# Altium PCB usomiq-bone-cape.PcbDoc
Units mm, origin at the board's own origin, x right, y up, seen from the top; angles counter-clockwise.
Board outline 86.36 x 54.61 mm, 2 copper layers (Top Layer, Bottom Layer); 62 components, 135 nets, 444 pads, 5 vias.
Unrouted connection lines stored in the file: 255.
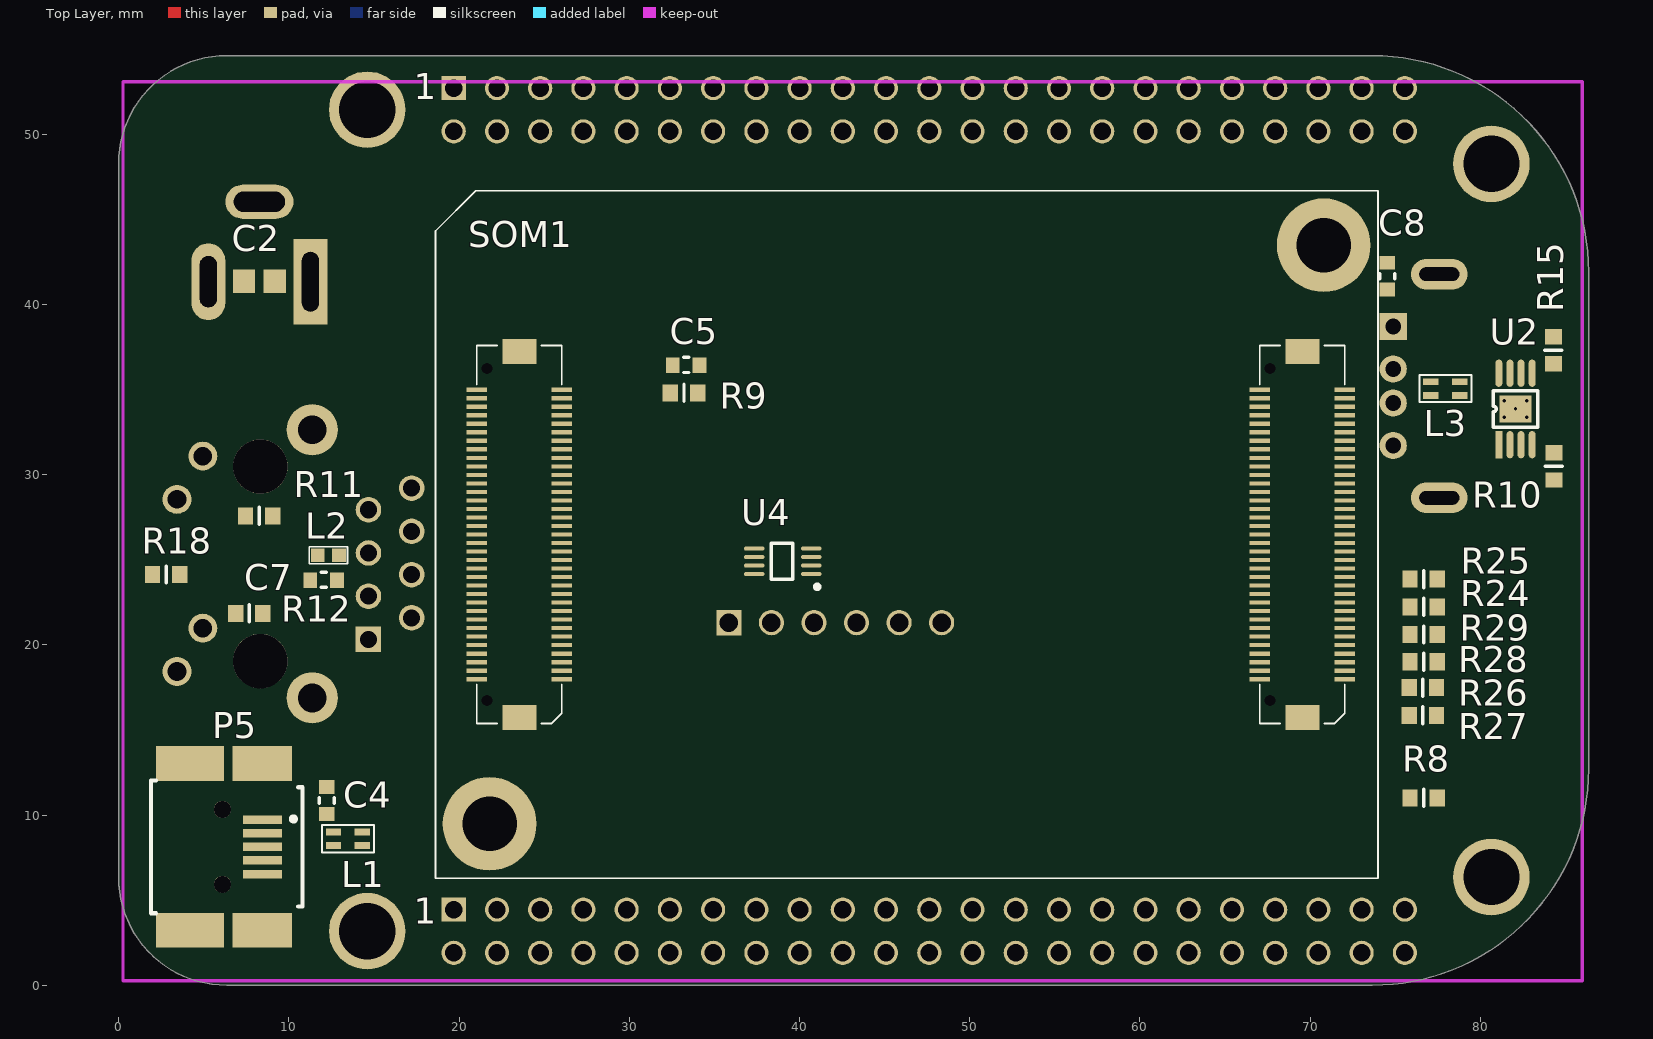
[diagram p0: Top Layer view]
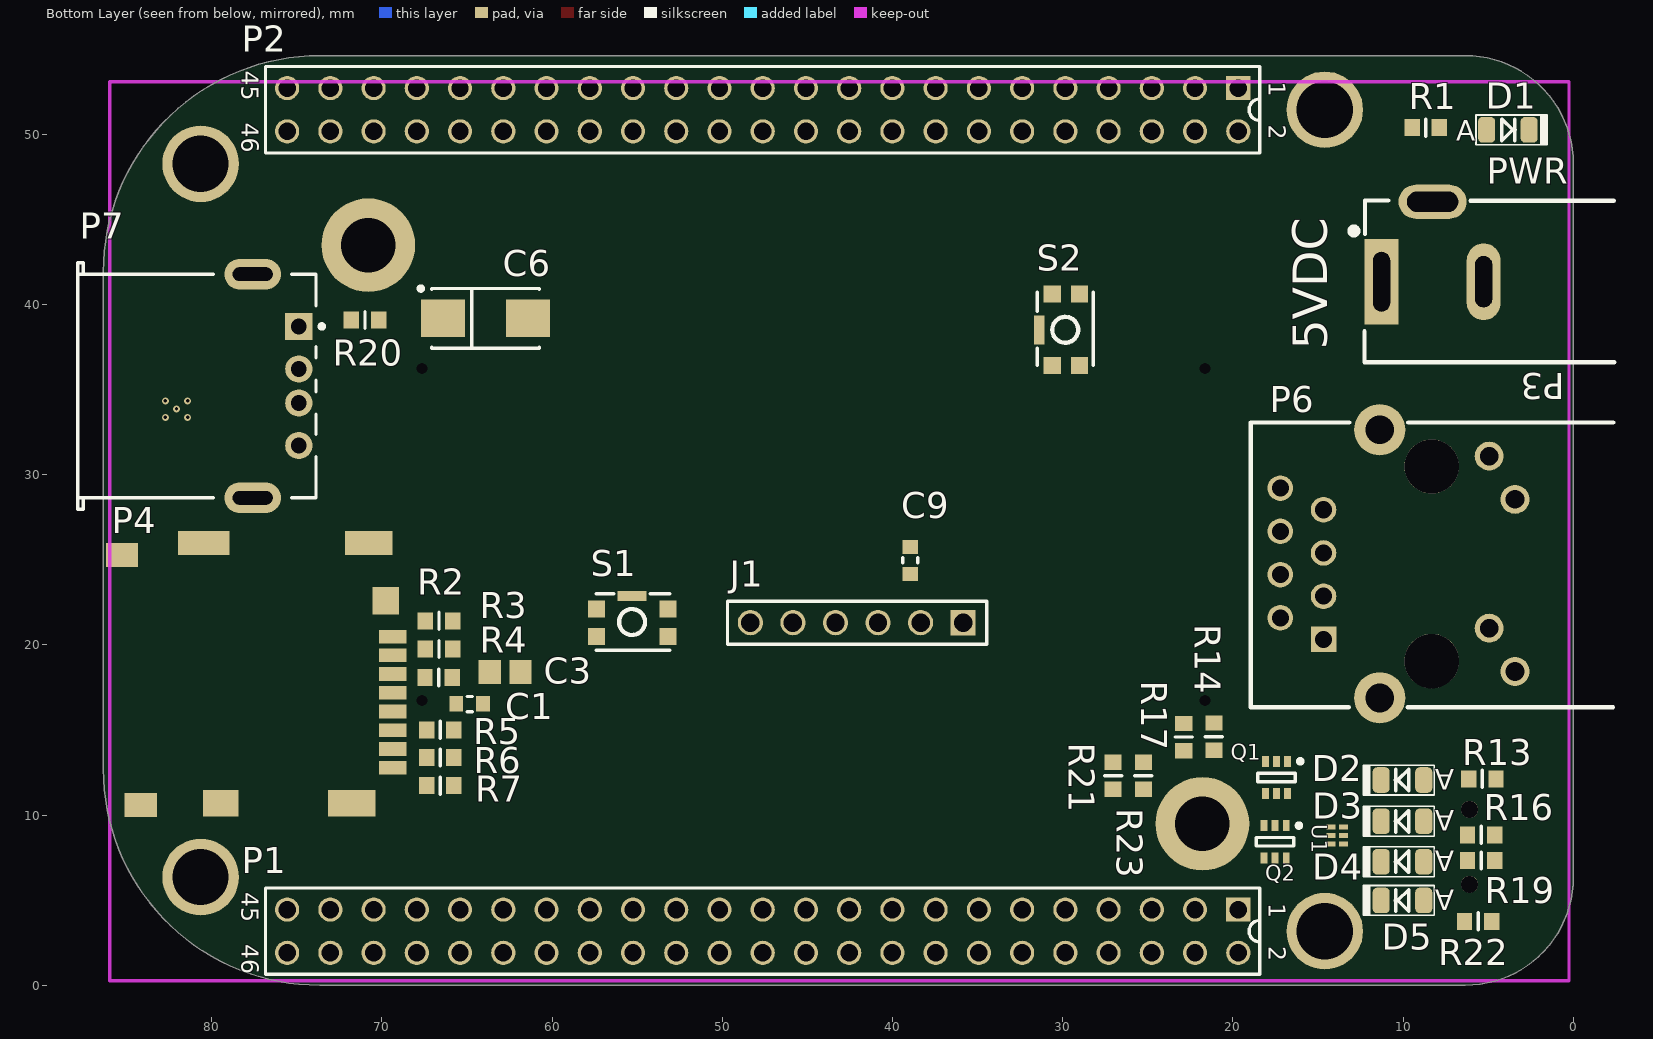
[diagram p1: Bottom Layer view, seen from below]

## Layer stack, top to bottom
Top Layer: signal copper 0.0356
Dielectric: dielectric 0.32, FR-4, Dk 4.8
Bottom Layer: signal copper 0.0356

## Board outline
0,6.35 0,48.26 cw(c6.35,48.26) 6.35,54.61 73.66,54.61 cw(c73.66,41.91) 86.36,41.91 86.36,12.7 cw(c73.66,12.7) 73.66,0 6.35,0 cw(c6.35,6.35)

## Design rules (kind name [scope] priority, off if disabled: settings)
AssemblyTestPointUsage AssemblyTestPointUsage_1 [All] p2:
AssemblyTestpoint AssemblyTestpoint_1 [All] p2: testpointundercomponent=TRUE minsize=1.016 maxsize=2.54 preferedsize=1.524 minholesize=0 maxholesize=1.016 preferedholesize=0.813 testpointgrid=0.025 usegrid=TRUE gridtolerance=0 allowsidetop=TRUE allowsidebottom=TRUE
Clearance [All] p1: gap=0.2
ComponentClearance ComponentClearance_1 [All] p2: gap=0.254 collisioncheckmode=3 verticalgap=0.254 showdistances=FALSE
DiffPairsRouting [All] p1: maxlimit=0.254 minlimit=0.254 mostfreqgap=0.254 maxuncoupledlength=12.7
DiffPairsRouting DiffPairsRouting_1 [All] p2: maxlimit=0.254 minlimit=0.254 mostfreqgap=0.254 maxuncoupledlength=12.7
FabricationTestPointUsage FabricationTestPointUsage_1 [All] p2: valid=0 allowmultiple=FALSE
FabricationTestpoint FabricationTestpoint_1 [All] p2: side=3 testpointundercomponent=TRUE minsize=1.016 maxsize=2.54 preferedsize=1.524 minholesize=0 maxholesize=1.016 preferedholesize=0.813 testpointgrid=0.025 allowsidetop=TRUE allowsidebottom=TRUE usegrid=TRUE gridtolerance=0
FanoutControl Fanout_LCC [IsLCC] p1: bgadir=Out bgaviamode=Centered fanoutstyle=Auto fanoutdirection=Alternating viagrid=0.025 // Fanout_LCC (Default Rule)
FanoutControl Fanout_BGA [IsBGA] p2: bgadir=Out bgaviamode=Centered fanoutstyle=Auto fanoutdirection=Alternating viagrid=0.025 // Fanout_BGA (Default Rule)
FanoutControl Fanout_Default [All] p4: bgadir=Out bgaviamode=Centered fanoutstyle=Auto fanoutdirection=Alternating viagrid=0.025 // Fanout_Default (Default Rule)
FanoutControl Fanout_Small [(CompPinCount < 5)] p5: bgadir=Out bgaviamode=Centered fanoutstyle=Auto fanoutdirection=OutThenIn viagrid=0.025 // Fanout_Small (Default Rule)
FanoutControl Fanout_BGA_1 [IsBGA] p6: bgadir=Out bgaviamode=Centered fanoutstyle=Auto fanoutdirection=Alternating viagrid=0.025 // Fanout_BGA (Default Rule)
FanoutControl Fanout_LCC_1 [IsLCC] p7: bgadir=Out bgaviamode=Centered fanoutstyle=Auto fanoutdirection=Alternating viagrid=0.025 // Fanout_LCC (Default Rule)
FanoutControl Fanout_SOIC_1 [IsSOIC] p8: bgadir=Out bgaviamode=Centered fanoutstyle=Auto fanoutdirection=Alternating viagrid=0.025 // Fanout_SOIC (Default Rule)
FanoutControl Fanout_Small_1 [(CompPinCount < 5)] p9: bgadir=Out bgaviamode=Centered fanoutstyle=Auto fanoutdirection=OutThenIn viagrid=0.025 // Fanout_Small (Default Rule)
FanoutControl Fanout_Default_1 [All] p10: bgadir=Out bgaviamode=Centered fanoutstyle=Auto fanoutdirection=Alternating viagrid=0.025 // Fanout_Default (Default Rule)
Height Height_1 [All] p2: minheight=0 maxheight=25.4 prefheight=12.7
HoleSize HoleSize_1 [All] p2: absolutevalues=TRUE maxlimit=2.54 minlimit=0.025 maxpercent=80.000 minpercent=20.000
HoleToHoleClearance HoleToHoleClearance_1 [All] p2: gap=0.254 allowstackedmicrovias=TRUE
LayerPairs LayerPairs_1 [All] p2: enforce=TRUE
MinimumSolderMaskSliver MinimumSolderMaskSliver_1 [All] p2: minsoldermaskwidth=0.254
NetAntennae NetAntennae_1 [All] p2: netantennaetolerance=0
PasteMaskExpansion PasteMaskExpansion_1 [All] p2: expansion=0
PlaneClearance PlaneClearance_1 [All] p2: clearance=0.508
PolygonConnect [All] p1: connectstyle=Relief reliefconductorwidth=0.254 reliefentries=4 polygonreliefangle="90 Angle" airgapwidth=0.254
PolygonConnect PolygonConnect_1 [All] p2: connectstyle=Relief reliefconductorwidth=0.254 reliefentries=4 polygonreliefangle="90 Angle" airgapwidth=0.254
RoutingPriority RoutingPriority_1 [All] p2: routingpriority=0
RoutingTopology RoutingTopology_1 [All] p2: topology=Shortest
RoutingVias [All] p1: holewidth=0.4 width=0.8 viastyle="Through Hole" minholewidth=0.711 minwidth=1.27 maxholewidth=0.711 maxwidth=1.27
ShortCircuit ShortCircuit_1 [All] p2: allowed=FALSE
SilkToSilkClearance SilkToSilkClearance_1 [All] p2: silktosilkclearance=0.254
SilkscreenOverComponentPads [All] p1: minsilkscreentomaskgap=0.254
SilkscreenOverComponentPads SilkscreenOverComponentPads_1 [All] p2: minsilkscreentomaskgap=0.254
SolderMaskExpansion [All] p1: expansion=0.102
SolderMaskExpansion SolderMaskExpansion_1 [All] p2: expansion=0.102
UnRoutedNet UnRoutedNet_1 [All] p2:
Width [All] p1: maxlimit=0.2 minlimit=0.2 preferedwidth=0.2
22 further rules are at their usual default settings.

## Classes and differential pairs
component class usomiq: SOM1
component class bone_capes: P1 P2
differential pair USB1: +USB1_P -USB1_N
differential pair USB1_D: +USB1_D_P -USB1_D_N
differential pair USB0: +USB0_P -USB0_N
differential pair USB0_D: +USB0_D_P -USB0_D_N
differential pair ETH_TX: +ETH_TX_P -ETH_TX_N
differential pair ETH_RX: +ETH_RX_P -ETH_RX_N

## Components (designator, comment, footprint, x,y, rotation, side; value= is the part's Value field where it differs from the comment)
C1 "C0603" CC1608-0603 64.839,16.532 r180 bottom
C2 "C0805" CC2012-0805 8.269,41.355 r0 top
C3 "C0805" CC2012-0805 62.764,18.407 r0 bottom
C4 "C0603" CC1608-0603 12.219,10.855 r90 top
C5 "C0603" CC1608-0603 33.339,36.432 r180 top
C6 "Cap_C" Cap_C 63.914,39.182 r180 bottom
C7 "C0603" CC1608-0603 12.044,23.805 r180 top
C8 "C0603" CC1608-0603 74.539,41.657 r270 top
C9 "C0603" CC1608-0603 38.964,24.957 r90 bottom
D1 "LED0805" LED0805 5.094,50.255 r180 bottom
D2 "LED0805" LED0805 8.789,12.057 r0 bottom
D3 "LED0805" LED0805 8.789,9.632 r0 bottom
D4 "LED0805" LED0805 8.789,7.257 r0 bottom
D5 "LED0805" LED0805 8.789,4.982 r0 bottom
J1 "HEADER 6" DIP6 35.85,21.3 r270 bottom
L1 "DLW21H" DLW21H 13.469,8.605 r0 top
L2 "BLM18A-FB" CHIP0603 11.694,25.255 r0 top
L3 "DLW21H" DLW21H 77.944,35.055 r180 top
P1 "HDR_46_F_2_0.1_0.1" DIP46 19.685,4.445 r270 bottom
P2 "HDR_46_F_2_0.1_0.1" DIP46 19.685,52.705 r270 bottom
P3 "PJ-002A" PJ-002A 11.269,41.33 r90 bottom
P4 "49225-0821" SDCard 77.314,18.282 r270 bottom
P5 "MiniUSB-B" "MINI-USB-B5 SMT" 2.194,12.63 r0 top
P6 "CONN_RJ45_MAG_WE_0" TRJ0011ABNL 14.675,20.315 r90 bottom
P7 "CONN_54819-0578_2" USB2.5-2H4C 87.869,35.205 r0 bottom
Q1 "RN1907" SOT363-6L 17.444,12.205 r270 bottom
Q2 "RN1907" SOT363-6L 17.519,8.43 r270 bottom
R1 "R0603" RESC1608X55N 8.669,50.38 r0 bottom
R2 "R0603" RESC1608X55N 66.644,21.405 r180 bottom
R3 "R0603" RESC1608X55N 66.644,19.755 r180 bottom
R4 "R0603" RESC1608X55N 66.669,18.08 r180 bottom
R5 "R0603" RESC1608X55N 66.569,15.005 r180 bottom
R6 "R0603" RESC1608X55N 66.569,13.38 r180 bottom
R7 "R0603" RESC1608X55N 66.569,11.73 r180 bottom
R8 "R0603" RESC1608X55N 76.669,11.005 r180 top
R9 "R0603" RESC1608X55N 33.214,34.807 r180 top
R10 "R0603" RESC1608X55N 84.314,30.482 r90 top
R11 "R0603" RESC1608X55N 8.25,27.575 r180 top
R12 "R0603" RESC1608X55N 7.675,21.85 r180 top
R13 "R0603" RESC1608X55N 5.344,12.13 r180 bottom
R14 "R0603" RESC1608X55N 21.114,14.607 r270 bottom
R15 "R0603" RESC1608X55N 84.289,37.307 r90 top
R16 "R0603" RESC1608X55N 5.419,8.83 r180 bottom
R17 "R0603" RESC1608X55N 22.889,14.582 r270 bottom
R18 "R0603" RESC1608X55N 2.794,24.13 r180 top
R19 "R0603" RESC1608X55N 5.419,7.33 r180 bottom
R20 "R0603" RESC1608X55N 70.989,39.082 r0 bottom
R21 "R0603" RESC1608X55N 27.039,12.307 r90 bottom
R22 "R0603" RESC1608X55N 5.594,3.755 r180 bottom
R23 "R0603" RESC1608X55N 25.264,12.307 r90 bottom
R24 "R0603" RESC1608X55N 76.669,22.23 r180 top
R25 "R0603" RESC1608X55N 76.669,23.855 r180 top
R26 "R0603" RESC1608X55N 76.619,17.48 r180 top
R27 "R0603" RESC1608X55N 76.619,15.855 r180 top
R28 "R0603" RESC1608X55N 76.669,19.005 r180 top
R29 "R0603" RESC1608X55N 76.669,20.605 r180 top
S1 "SW_KT11P2JM_2" KMR231GLFS 57.4,22.1 r180 bottom
S2 "SW_KT11P2JM_2" KMR231GLFS 30.614,36.407 r90 bottom
SOM1 "som-am335x" am3359_module-sockets 21.789,9.482 r0 top
U1 "TPD4S012" s-puson-n6 14.239,9.307 r180 bottom
U2 "TPS2051B" R-PDSO-G8 81.089,31.757 r90 top
U4 "IC_SN74LVC2G241_1" SOP127P600-8N 39.014,24.907 r180 top

## Footprints (in the part's own frame and the unit in brackets; to place one, negate y for a bottom-side part, rotate by r counter-clockwise, add the part's x,y. Pads: shape width x height; smd on the part's side, far side on the other; paste and mask are expansions set on the pad)
am3359_module-sockets [mm]
  rect 1.2x0.25 smd paste+0 mask+0.02: A1(4.25,8.5) A2(-0.75,8.5) A3(4.25,9) A4(-0.75,9) A5(4.25,9.5) A6(-0.75,9.5) A7(4.25,10) A8(-0.75,10) A9(4.25,10.5) A10(-0.75,10.5) A11(4.25,11) A12(-0.75,11) A13(4.25,11.5) A14(-0.75,11.5) A15(4.25,12) A16(-0.75,12) A17(4.25,12.5) A18(-0.75,12.5) A19(4.25,13) A20(-0.75,13) A21(4.25,13.5) A22(-0.75,13.5) A23(4.25,14) A24(-0.75,14) A25(4.25,14.5) A26(-0.75,14.5) A27(4.25,15) A28(-0.75,15) A29(4.25,15.5) A30(-0.75,15.5) A31(4.25,16) A32(-0.75,16) A33(4.25,16.5) A34(-0.75,16.5) A35(4.25,17) A36(-0.75,17) A37(4.25,17.5) A38(-0.75,17.5) A39(4.25,18) A40(-0.75,18) A41(4.25,18.5) A42(-0.75,18.5) A43(4.25,19) A44(-0.75,19) A45(4.25,19.5) A46(-0.75,19.5) A47(4.25,20) A48(-0.75,20) A49(4.25,20.5) A50(-0.75,20.5) A51(4.25,21) A52(-0.75,21) A53(4.25,21.5) A54(-0.75,21.5) A55(4.25,22) A56(-0.75,22) A57(4.25,22.5) A58(-0.75,22.5) A59(4.25,23) A60(-0.75,23) A61(4.25,23.5) A62(-0.75,23.5) A63(4.25,24) A64(-0.75,24) A65(4.25,24.5) A66(-0.75,24.5) A67(4.25,25) A68(-0.75,25) A69(4.25,25.5) A70(-0.75,25.5) B1(50.25,8.5) B2(45.25,8.5) B3(50.25,9) B4(45.25,9) B5(50.25,9.5) B6(45.25,9.5) B7(50.25,10) B8(45.25,10) B9(50.25,10.5) B10(45.25,10.5) B11(50.25,11) B12(45.25,11) B13(50.25,11.5) B14(45.25,11.5) B15(50.25,12) B16(45.25,12) B17(50.25,12.5) B18(45.25,12.5) B19(50.25,13) B20(45.25,13) B21(50.25,13.5) B22(45.25,13.5) B23(50.25,14) B24(45.25,14) B25(50.25,14.5) B26(45.25,14.5) B27(50.25,15) B28(45.25,15) B29(50.25,15.5) B30(45.25,15.5) B31(50.25,16) B32(45.25,16) B33(50.25,16.5) B34(45.25,16.5) B35(50.25,17) B36(45.25,17) B37(50.25,17.5) B38(45.25,17.5) B39(50.25,18) B40(45.25,18) B41(50.25,18.5) B42(45.25,18.5) B43(50.25,19) B44(45.25,19) B45(50.25,19.5) B46(45.25,19.5) B47(50.25,20) B48(45.25,20) B49(50.25,20.5) B50(45.25,20.5) B51(50.25,21) B52(45.25,21) B53(50.25,21.5) B54(45.25,21.5) B55(50.25,22) B56(45.25,22) B57(50.25,22.5) B58(45.25,22.5) B59(50.25,23) B60(45.25,23) B61(50.25,23.5) B62(45.25,23.5) B63(50.25,24) B64(45.25,24) B65(50.25,24.5) B66(45.25,24.5) B67(50.25,25) B68(45.25,25) B69(50.25,25.5) B70(45.25,25.5)
  round 5.5 hole 3.2 unplated mask+0.05: GND(0,0) GND(49,34)
  rect 2x1.45 smd mask+0.02: GND(1.75,6.25) GND(1.75,27.75) GND(47.75,6.25) GND(47.75,27.75)
  rect 0x0.25 hole 0.625 mask+0.02: NC(-0.15,7.25) NC(-0.15,26.75) NC(45.85,7.25) NC(45.85,26.75)
  silkscreen extent -3.17,-3.2 52.2,37.2, body extent -1.12,5.89 50.58,28.13, height 3.5
Cap_C [mm] "Capacitor, SM Tantalum; Body 6.0 x 3.2 mm (LxW typ)"
  rect 2.6x2.2 smd: 1(-2.5,0) 2(2.5,0)
  silkscreen extent -3.93,-1.75 3.15,1.87, body extent -3.15,-1.75 3.15,1.75, height 2.8
CC1608-0603 [mil] "Chip Capacitor, 2-Leads, Body 1,6x0,8mm, IPC Medium Density"
  rect 32x36 smd: 1(-31,0) 2(31,0)
  silkscreen extent -6,-18 6,17, body extent -31,-16 31,16, height 31
CC2012-0805 [mm] "Chip Capacitor, 2-Leads, Body 2,0x1,25mm, IPC Medium Density"
  rect 1.3x1.4 smd: 1(-0.9,0) 2(0.9,0)
  body extent -1,-0.6 1,0.6, height 1.2
CHIP0603 [mm]
  rect 0.8x0.8 smd: 1(0,0) 2(1.25,0)
  silkscreen extent -0.5,-0.5 1.75,0.5, body extent -0.53,-0.5 1.75,0.51, height 0.95
DIP6 [mm]
  rect 1.48x1.48 hole 1.08: 1(0,0)
  round 1.48 hole 1.08: 2(0,-2.5) 3(0,-5) 4(0,-7.5) 5(0,-10) 6(0,-12.5)
  silkscreen extent -1.27,-13.84 1.27,1.4, body extent -1.15,-13.72 1.12,1.28, height 8
DIP46 [mm]
  rect 1.42x1.42 hole 1.02: 1(0,0)
  round 1.42 hole 1.02: 2(2.54,0) 3(0,-2.54) 4(2.54,-2.54) 5(0,-5.08) 6(2.54,-5.08) 7(0,-7.62) 8(2.54,-7.62) 9(0,-10.16) 10(2.54,-10.16) 11(0,-12.7) 12(2.54,-12.7) 13(0,-15.24) 14(2.54,-15.24) 15(0,-17.78) 16(2.54,-17.78) 17(0,-20.32) 18(2.54,-20.32) 19(0,-22.86) 20(2.54,-22.86) 21(0,-25.4) 22(2.54,-25.4) 23(0,-27.94) 24(2.54,-27.94) 25(0,-30.48) 26(2.54,-30.48) 27(0,-33.02) 28(2.54,-33.02) 29(0,-35.56) 30(2.54,-35.56) 31(0,-38.1) 32(2.54,-38.1) 33(0,-40.64) 34(2.54,-40.64) 35(0,-43.18) 36(2.54,-43.18) 37(0,-45.72) 38(2.54,-45.72) 39(0,-48.26) 40(2.54,-48.26) 41(0,-50.8) 42(2.54,-50.8) 43(0,-53.34) 44(2.54,-53.34) 45(0,-55.88) 46(2.54,-55.88)
  silkscreen extent -1.27,-57.15 3.81,1.27, body extent -1.27,-57.15 3.81,1.27, height 8.51
DLW21H [mm] "DLW21H Series Murata"
  rect 0.9x0.4 smd mask+0.05: 1(-0.85,-0.4) 2(0.85,-0.4) 3(0.85,0.4) 4(-0.85,0.4)
  silkscreen extent -1.52,-0.8 1.52,0.8, body extent -1,-0.6 1,0.6, height 1.2
KMR231GLFS [mm] "Tactile Switches"
  rect 1x1 smd: 1(0,0) 2(0,-1.6) 3(4.2,0) 4(4.2,-1.6)
  rect 1.7x0.6 smd: 5(2.1,0.762)
  silkscreen extent 0,-2.41 4.32,0.89, body extent 0.13,-2.29 4.06,0.76, height 1.5
LED0805 [mm]
  rrect50% 1x1.5 smd: 1(0,0) 2(2.5,0)
  silkscreen extent -0.63,-0.87 3.55,0.87, body extent -0.64,-0.89 3.17,0.89, height 1.1
"MINI-USB-B5 SMT" [mm]
  rect 2.3x0.5 smd: 1(6.25,-2.9) 2(6.25,-3.7) 3(6.25,-4.5) 4(6.25,-5.3) 5(6.25,-6.1)
  rect 4x2.05 smd: 6(2,-9.4) 9(2,0.4)
  rect 3.5x2.05 smd: 7(6.25,-9.4) 8(6.25,0.4)
  round 1 hole 1 unplated: SYSPAD10(3.9,-6.7) SYSPAD11(3.9,-2.3)
  silkscreen extent -0.3,-8.4 8.6,-0.6, body extent -1.84,-9.79 7.36,0.91, height 3.95
PJ-002A [mm] "DC POWER JACK"
  rect 5x2 hole 1 slot 3.5 at 0 deg: 1(0,0)
  oval 4.5x2 hole 1 slot 3 at 0 deg: 2(0,-6)
  oval 2x4 hole 1.2 slot 3 at 90 deg: 3(4.7,-3)
  silkscreen extent -4.72,-13.67 4.77,1.81, body extent -4.37,-13.59 4.93,0.41, height 11
R-PDSO-G8 [mm]
  rect 1.6x0.4 smd: 1(0,0)
  oval 1.6x0.4 smd: 2(0,-0.65) 3(0,-1.3) 4(0,-1.95) 5(4.2,-1.95) 6(4.2,-1.3) 7(4.2,-0.65) 8(4.2,0)
  rect 1.57x1.89 smd: 9(2.1,-0.975)
  silkscreen extent 1.03,-2.28 3.17,0.33, body extent 0.45,-2.75 3.73,0.8, height 1.1
RESC1608X55N [mm] "Chip Resistor, EIA 0603, Metric 1608, Body 1.6x0.8mm, IPC Medium Density"
  rect 0.9x1 smd: 1(-0.8,0) 2(0.8,0)
  silkscreen extent 0,-0.5 0,0.5, body extent -0.87,-0.47 0.88,0.48, height 0.55
s-puson-n6 [mm]
  rect 0.52x0.3 smd mask+0.05: 1(0,0) 2(0,-0.5) 3(0,-1) 4(0.74,-1) 5(0.74,-0.5) 6(0.74,0)
  body extent -0.25,-1.14 1.02,0.13, height 0.6
SDCard [mm] "molex 0492250821"
  rect 0.8x1.6 smd: 1(-2.2,7.95) 2(-1.1,7.95) 3(0,7.95) 4(1.1,7.95) 5(2.2,7.95) 6(3.3,7.95) 7(4.4,7.95) 8(5.5,7.95)
  rect 1.55x2.8 smd: 9(7.6,5.55)
  rect 1.55x2.1 smd: 10(7.6,-2.15)
  rect 1.4x1.9 smd: 11(7.7,-6.85) 12(-7,-7.95)
  rect 1.4x3 smd: 13(-7.7,-3.15)
  rect 1.4x2.8 smd: 14(-7.7,6.55)
  rect 1.6x1.55 smd: 15(-4.3,7.55)
  body extent -8.05,-8.5 8.05,8.55, height 1.95
SOP127P600-8N [mm]
  oval 1.2x0.25 smd mask+0.05: 1(-1.675,0.75) 2(-1.675,0.25) 3(-1.675,-0.25) 4(-1.675,-0.75) 5(1.675,-0.75) 6(1.675,-0.25) 7(1.675,0.25) 8(1.675,0.75)
  silkscreen extent -2.15,-1.05 0.67,1.62, body extent -1.55,-1.05 1.55,1.05, height 0.9
SOT363-6L [mm] "SOT363, 6-Leads, Body 2x1.3mm, Pitch 0.65mm, Lead Span 2.1mm, IPC High Density"
  rect 0.65x0.4 smd: 1(-0.95,0.65) 2(-0.95,0) 3(-0.95,-0.65) 4(0.95,-0.65) 5(0.95,0) 6(0.95,0.65)
  silkscreen extent -1.07,-1.1 0.25,1.52, body extent -1.15,-1.1 1.15,1.1, height 1
TRJ0011ABNL [mm] "TRJ0011ABNL RJ-45 magnet"
  round 3.2 hole 3.2 unplated: 0(-1.27,-6.35) 0(10.16,-6.35)
  rect 1.5x1.5 hole 1: 1(0,0)
  round 1.5 hole 1: 2(1.27,2.54) 3(2.54,0) 4(3.81,2.54) 5(5.08,0) 6(6.35,2.54) 7(7.62,0) 8(8.89,2.54)
  round 1.7 hole 1.1: 9(-1.88,-11.25) 10(0.66,-9.73) 11(8.23,-11.25) 12(10.77,-9.73)
  round 3 hole 1.7: 13(-3.43,-3.3) 14(12.32,-3.3)
  silkscreen extent -3.98,-17.02 12.75,4.28, body extent -3.7,-17.1 12.5,4.06, height 13.4
USB2.5-2H4C [mm] "Connector; USB1.1, Type A, Thru-Hole; 4 Position; Right Angle"
  rect 1.6x1.6 hole 0.92: 1(-12.99,-3.5)
  round 1.6 hole 0.92: 2(-12.99,-1) 3(-12.99,1) 4(-12.99,3.5)
  oval 3.34x1.8 hole 0.8 slot 2.34 at 0 deg: 5(-10.28,6.57) 6(-10.28,-6.57)
  silkscreen extent -14.46,-7.25 0,7.25, body extent -14,-7.9 0.13,7.9, height 7.55

## Part data
C6: "Tantalum Capacitor Case C"
D1 D2 D3 D4 D5: "LED 0805"
J1: "CONN HEADER 6POS, VERTICAL,  .100 STR TIN"
L1 L3: "Low profile wire-wound common choke coil"
L2: "Chip EMIFILr Inductor Type"
P1 P2: "NN HEADER FMAL 46PS.1\" DL GOLD"
P3: "DC POWER JACK"
P4: library part Mol_49225-0821, "Connector for microSD™ Card (Push-push Type)"
P5: "Mini USB Type B CONNECTOR"
P6: "RJ-45 10/100 W/Magnetics"
P7: "USB Type A Connectors"
Q1 Q2: "Transistor Silicon NPN"
S1 S2: "SMD button"
U1: "4-Channel USB ESD Solution with Power Clamp"
U2: "CURRENT-LIMITED, POWER-DISTRIBUTION SWITCHES"
U4: "Dual Buffer/Driver With 3-State Outputs"

## Free pads (board coordinates)
  round 4.5 hole 3.3: free(14.605,3.175) free(14.605,51.435) free(80.645,6.35) free(80.645,48.26)

## Via types
v1: diameter 0.4, hole 0.2, Top Layer to Bottom Layer, 5 vias

## Nets (pads, with @x,y where several pads share a name; then routed paths per layer and width w, separated by ;. In a path a pad name is that pad's centre, name@x,y a point inside that pad or via, vN(x,y) a via of type N, cw(c..) or ccw(c..) an arc to the next point about the centre after c; other vN are vias at no path point)
5VDC: C2.2 C6.1 P2.5 P2.6 P2.7 P2.8 P3.1 R1.2 R20.2 SOM1.A2 SOM1.A4 U2.2 U2.3
AIN0: P2.39 SOM1.A11
AIN1: P2.40 SOM1.A13
AIN2: P2.37 SOM1.A15
AIN3: P2.38 SOM1.A17
AIN4: P2.33 SOM1.A19
AIN5: P2.36 SOM1.A21
AIN6: P2.35 SOM1.A23
B_UART0_RX: J1.4 U4.2
B_UART0_TX: J1.5 U4.3
CLKOUT2: P2.41 SOM1.A38
DGND: C2.1 C4.2 C5.2 C6.2 C7.2 C8.1 C9.1 D1.2 J1.1 P1.1 P1.2 P2.1 P2.2 P2.43 P2.44 P2.45 P2.46 P3.2 P4.6 P4.9 P5.5 P6.8 P7.4 Q1.3 Q1.6 Q2.3 Q2.6 R10.1 R11.1 R12.1 R14.1 R17.1 R18.1 R21.1 R23.1 S2.1 S2.3 SOM1.A1 SOM1.A3 SOM1.A42 SOM1.A59 SOM1.A60 SOM1.A65 SOM1.A66 SOM1.B21 SOM1.B22 SOM1.B59 SOM1.B65 U1.4 U2.1 U2.9 U4.1 U4.4
  other v1: 81.414,33.357 82.714,33.357 82.064,33.857 81.414,34.332 82.714,34.332
EARTH: P4.11 P4.12 P4.13 P4.14 P4.15 P5.6 P5.7 P5.8 P5.9 P6.13 P6.14 P7.5 P7.6 R18.2
EHRPWM1A: P2.14 SOM1.B51
EHRPWM1B: P2.16 SOM1.B53
EHRPWM2A: P1.19
EHRPWM2B: P1.13
ETH_ALINK: P6.9 SOM1.A69
ETH_RX_N: P6.2 SOM1.A64
ETH_RX_P: P6.1 SOM1.A62
ETH_SPEED100: P6.12 SOM1.A67
ETH_TX_N: P6.6 SOM1.A70
ETH_TX_P: P6.3 SOM1.A68
GND: C1.2 C3.1
GNDA_ADC: P2.34 SOM1.A9 SOM1.A27
GPIO0_7: P2.42 SOM1.A43
GPIO0_26: P1.14
GPIO0_27: P1.17
GPIO1_12: P1.12
GPIO1_13: P1.11
GPIO1_14: P1.16
GPIO1_15: P1.15
GPIO1_16: P2.15 SOM1.B47
GPIO1_17: P2.23 SOM1.B49
GPIO1_28: P2.12
GPIO1_29: P1.26 SOM1.B27
GPIO2_1: P1.18 SOM1.B39
GPIO3_19: P2.27 SOM1.A16
GPIO3_21: P2.25 SOM1.A26
I2C1_SCL: P2.17 SOM1.A51
I2C1_SDA: P2.18 SOM1.A45
I2C2_SCL: P2.19 SOM1.A33
I2C2_SDA: P2.20 SOM1.A35
LCD_DATA0: P1.45 SOM1.B12
LCD_DATA1: P1.46 SOM1.B10
LCD_DATA2: P1.43 S1.2 S1.4 SOM1.B8
LCD_DATA3: P1.44 SOM1.B6
LCD_DATA4: P1.41 SOM1.B2
LCD_DATA5: P1.42 SOM1.B4
LCD_DATA6: P1.39 SOM1.B1
LCD_DATA7: P1.40 SOM1.B3
LCD_DATA8: P1.37 SOM1.B5
LCD_DATA9: P1.38 SOM1.B7
LCD_DATA10: P1.36 SOM1.B9
LCD_DATA11: P1.34 SOM1.B11
LCD_DATA12: P1.35 SOM1.B13
LCD_DATA13: P1.33 SOM1.B15
LCD_DATA14: P1.31 SOM1.B17
LCD_DATA15: P1.32 SOM1.B19
LCD_DE: P1.30 SOM1.B14
LCD_HSYNC: P1.29 SOM1.B16
LCD_PCLK: P1.28 SOM1.B20
LCD_VSYNC: P1.27 SOM1.B18
MMC0_CD: P4.10 R8.1 SOM1.A41
MMC0_CLKO: R27.2 SOM1.A58
MMC0_CMD: R26.2 SOM1.A56
MMC0_DAT0: R28.2 SOM1.A54
MMC0_DAT1: R29.2 SOM1.A52
MMC0_DAT2: R24.2 SOM1.A50
MMC0_DAT3: R25.2 SOM1.A48
MMC1_CLK: P1.21 SOM1.B37
MMC1_CMD: P1.20 SOM1.B35
MMC1_DAT0: P1.25 SOM1.B40
MMC1_DAT1: P1.24 SOM1.B42
MMC1_DAT2: P1.5 SOM1.B44
MMC1_DAT3: P1.6 SOM1.B41
MMC1_DAT4: P1.23 SOM1.B43
MMC1_DAT5: P1.22 SOM1.B45
MMC1_DAT6: P1.3 SOM1.B46
MMC1_DAT7: P1.4 SOM1.B48
NetC7_1: C7.1 L2.2 P6.4 P6.5
NetD1_1: D1.1 R1.1
NetD2_1: D2.1 R13.1
NetD2_2: D2.2 Q1.1
NetD3_1: D3.1 R16.1
NetD3_2: D3.2 Q1.4
NetD4_1: D4.1 R19.1
NetD4_2: D4.2 Q2.1
NetD5_1: D5.1 R22.1
NetD5_2: D5.2 Q2.4
NetP4_1: P4.1 R2.1 R24.1
NetP4_2: P4.2 R3.1 R25.1
NetP4_3: P4.3 R4.1 R26.1
NetP4_5: P4.5 R5.1 R27.1
NetP4_7: P4.7 R6.1 R28.1
NetP4_8: P4.8 R7.1 R29.1
NetP6_10: P6.10 R12.2
NetP6_11: P6.11 R11.2
PWR_BUT: P2.9 SOM1.A7
SPI1_CS0: P2.28 SOM1.A20
SPI1_D0: P2.29 SOM1.A24
SPI1_D1: P2.30 SOM1.A22
SPI1_SCLK: P2.31 SOM1.A18
SYS_RESETN: C5.1 P2.10 R9.1 S2.2 S2.4 SOM1.A36
TIMER4: P1.7 SOM1.B23
TIMER5: P1.9 SOM1.B31
TIMER6: P1.10 SOM1.B29
TIMER7: P1.8 SOM1.B25
UART0_RX: SOM1.A29 U4.6
UART0_TX: SOM1.A31 U4.5
UART1_RXD: P2.26 SOM1.A37
UART1_TXD: P2.24 SOM1.A39
UART2_RXD: P2.22 SOM1.A49
UART2_TXD: P2.21 SOM1.A47
UART4_RXD: P2.11 SOM1.B64
UART4_TXD: P2.13 SOM1.B62
USB0_D_N: L1.4 P5.2 U1.2
USB0_D_P: L1.1 P5.3 U1.1
USB0_ID: P5.4 SOM1.A57 U1.3
USB0_N: L1.3 SOM1.A61
USB0_P: L1.2 SOM1.A63
USB0_VBUS: C4.1 P5.1 SOM1.A53 U1.6
USB1_D_N: L3.2 P7.2
USB1_D_P: L3.3 P7.3
USB1_DRVVBUS: R10.2 SOM1.B63 U2.4
USB1_N: L3.1 SOM1.B69
USB1_OCN: R15.1 SOM1.B58 U2.5
USB1_P: L3.4 SOM1.B67
USB1_VBUS: C8.2 P7.1 R20.1 SOM1.B61 U2.6 U2.7 U2.8
USR0: Q1.2 R14.2 SOM1.B57
USR1: Q1.5 R17.2 SOM1.B50
USR2: Q2.2 R21.2 SOM1.B52
USR3: Q2.5 R23.2 SOM1.B54
VCC_IO: C1.1 C3.2 C9.2 L2.1 P2.3 P2.4 P4.4 R2.2 R3.2 R4.2 R5.2 R6.2 R7.2 R8.2 R9.2 R13.2 R15.2 R16.2 R19.2 R22.2 S1.1 S1.3 SOM1.A6 SOM1.A8 U4.7 U4.8
VDD_1V8: P2.32 SOM1.A5
pads on no net: J1.2 J1.3 J1.6 P3.3 P5.SYSPAD10 P5.SYSPAD11 P6.0 P6.7 S1.5 S2.5 SOM1.A10 SOM1.A12 SOM1.A14 SOM1.A25 SOM1.A28 SOM1.A30 SOM1.A32 SOM1.A34 SOM1.A40 SOM1.A44 SOM1.A46 SOM1.A55 SOM1.B24 SOM1.B26 SOM1.B28 SOM1.B30 SOM1.B32 SOM1.B33 SOM1.B34 SOM1.B36 SOM1.B38 SOM1.B55 SOM1.B56 SOM1.B60 SOM1.B66 SOM1.B68 SOM1.B70 SOM1.GND SOM1.NC U1.5

## Keep-outs
Keep-Out Layer:
  lines w0.2: 0.254,0.254 0.254,53.086 85.979,53.086 85.979,0.254 0.254,0.254

## Silkscreen, mask and mechanical layers (free items; w line width, h text height)
Top Overlay:
  text "1" at 17.325,52.05 h1.52
  text "1" at 17.325,3.625 h1.52
Bottom Overlay:
  text "PWR" at 5.075,47.075 h1.52
  text "5VDC" at 13.775,37.325 h3.5 r270
Mechanical 1:
  lines w0.254: 0,6.35 ccw(c6.35,6.35) 6.35,0 73.66,0 ccw(c73.66,12.7) 86.36,12.7 86.36,40.64 86.36,41.91 ccw(c73.66,41.91) 73.66,54.61 6.35,54.61 ccw(c6.35,48.26) 0,48.26 0,46.99 0,6.35
Drill Drawing:
  text ".LEGEND" at 133.833,131.572 h1.52
  text "Drill Drawing." at 133.833,129.032 h1.52

## Text inside footprints (layer, text, board x,y; h text height)
D1: Bottom Overlay "A" at 6.872,49.62 h1.2
D2: Bottom Overlay "A" at 7.011,12.692 h1.2 r180
D3: Bottom Overlay "A" at 7.011,10.267 h1.2 r180
D4: Bottom Overlay "A" at 7.011,7.892 h1.2 r180
D5: Bottom Overlay "A" at 7.011,5.617 h1.2 r180
P1: Bottom Overlay "1" at 17.907,4.826 h1 r90; Bottom Overlay "2" at 17.907,2.286 h1 r90; Bottom Overlay "45" at 78.232,5.461 h1 r90; Bottom Overlay "46" at 78.232,2.413 h1 r90
P2: Bottom Overlay "1" at 17.907,53.086 h1 r90; Bottom Overlay "2" at 17.907,50.546 h1 r90; Bottom Overlay "45" at 78.232,53.721 h1 r90; Bottom Overlay "46" at 78.232,50.673 h1 r90